# Altium PCB IOTM222.PcbDoc
Units mm, origin at the board's own origin, x right, y up, seen from the top; angles counter-clockwise.
Board outline 53.97 x 44 mm, 4 copper layers (Top Layer, GND-PLANE, signal-layer, Bottom Layer), stack 1.862 mm thick; 7 components, 78 nets, 421 pads, 0 vias.
Unrouted connection lines stored in the file: 155.
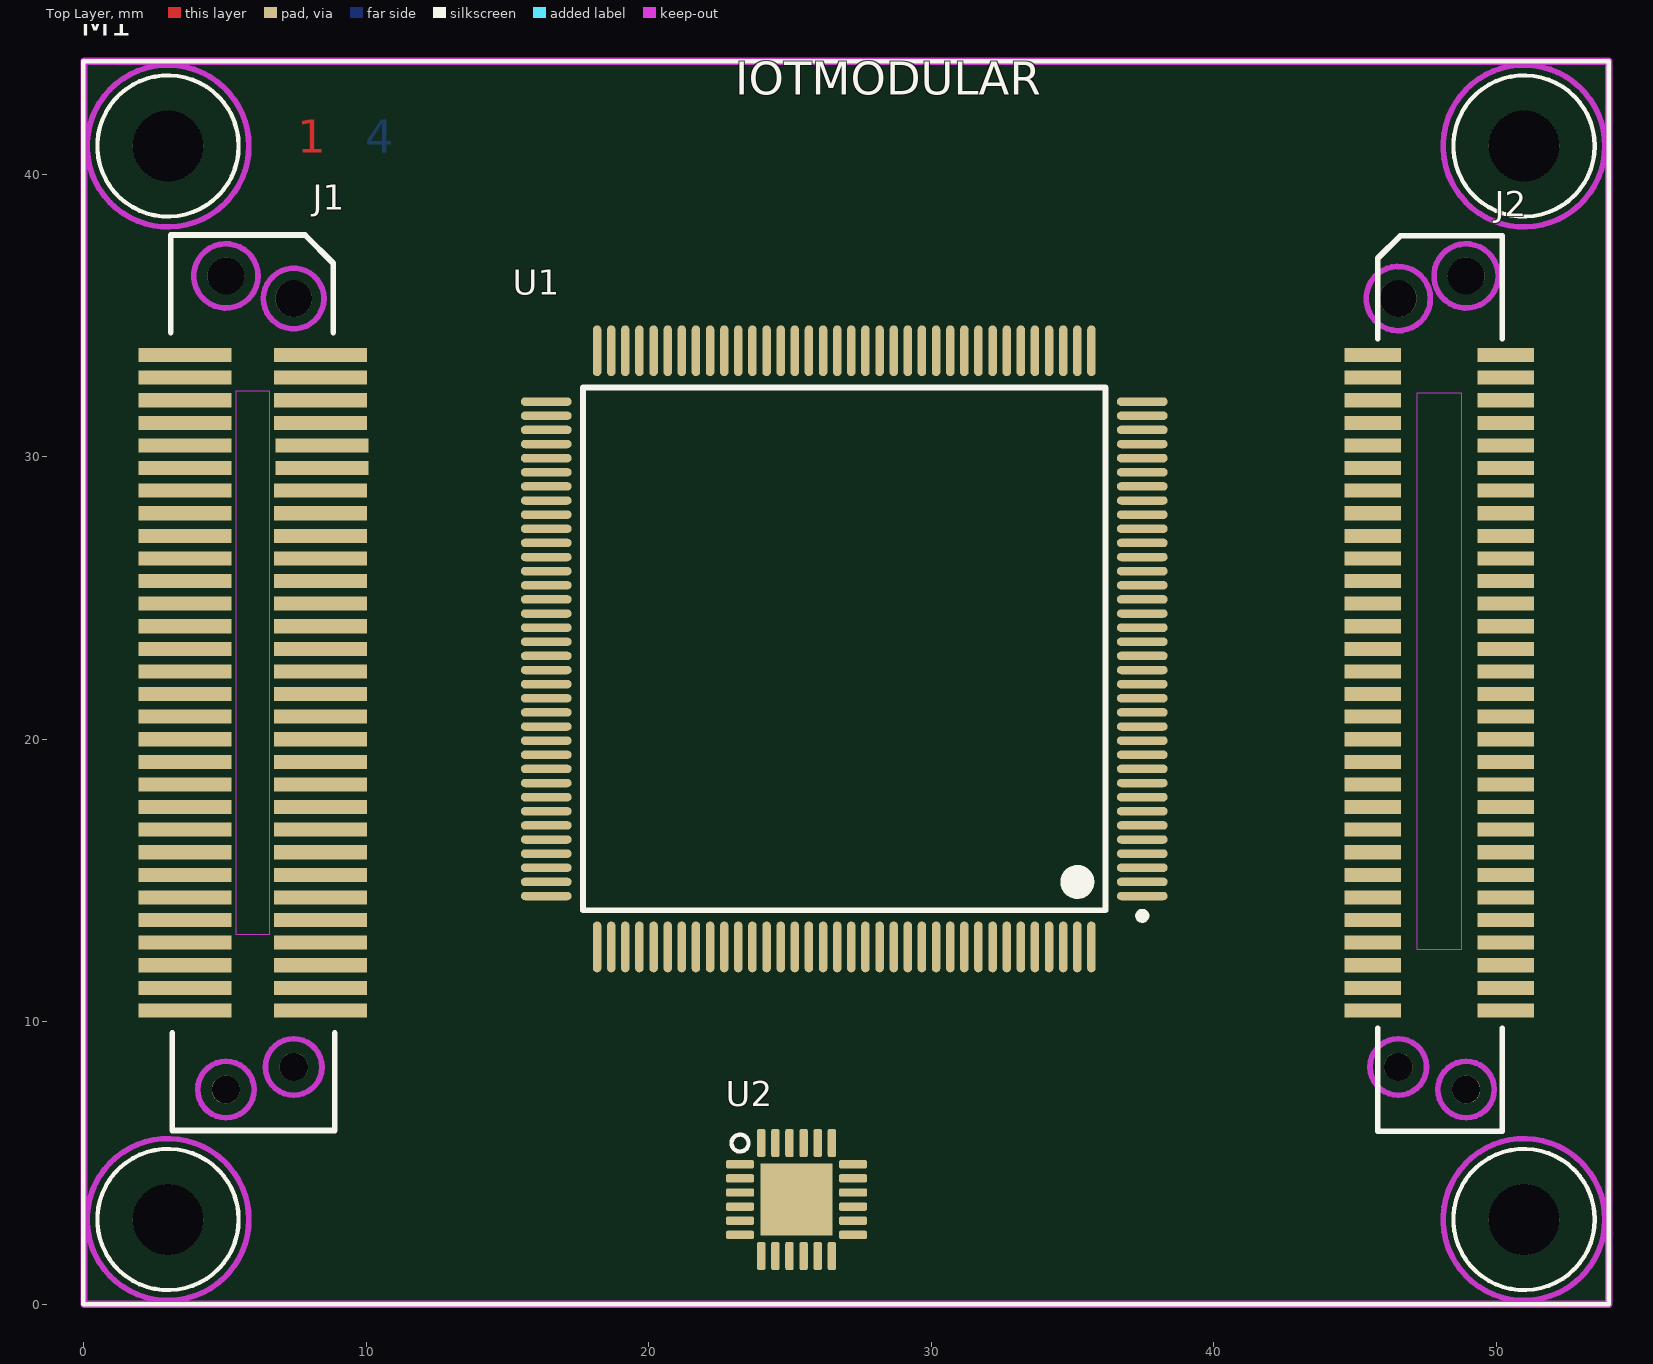
[diagram p0: Top Layer view]
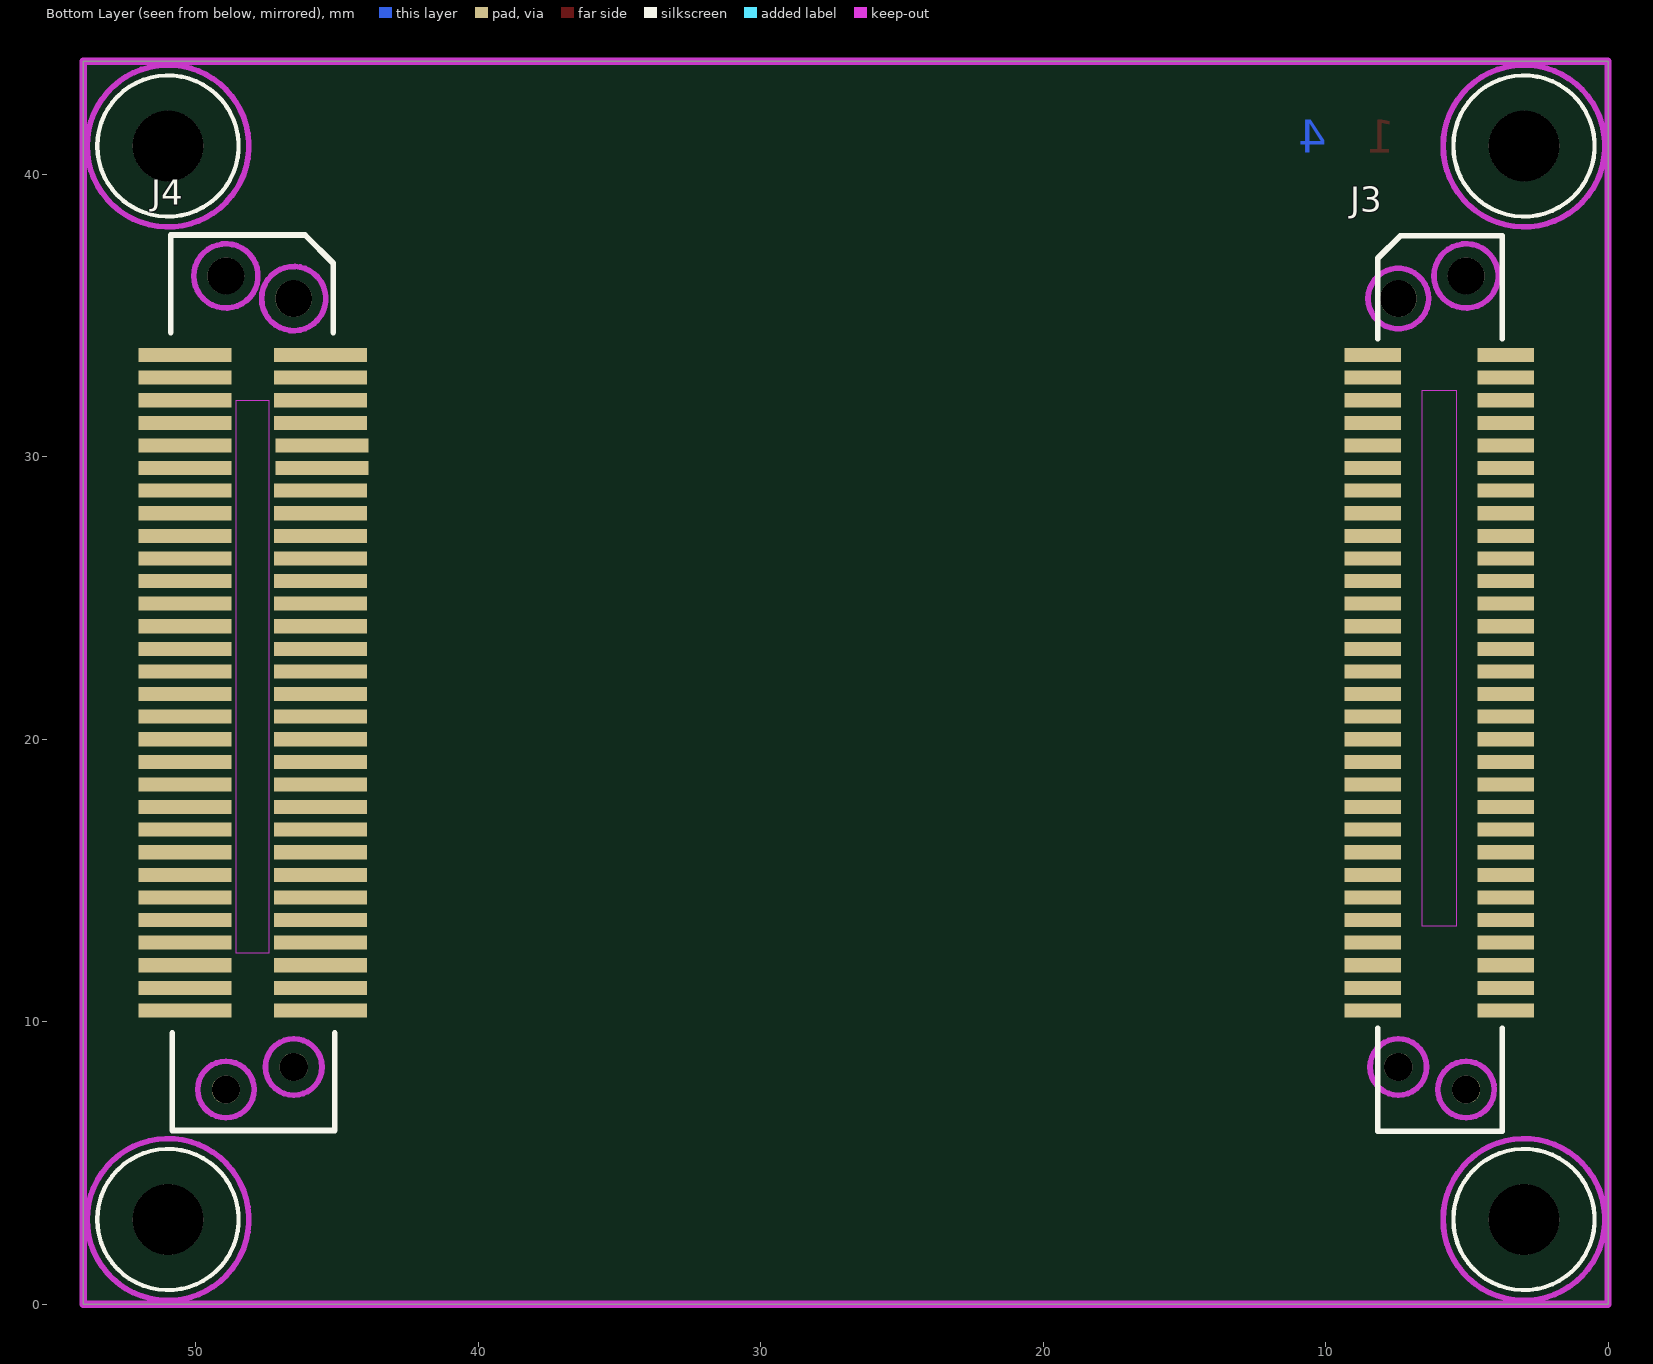
[diagram p1: Bottom Layer view, seen from below]
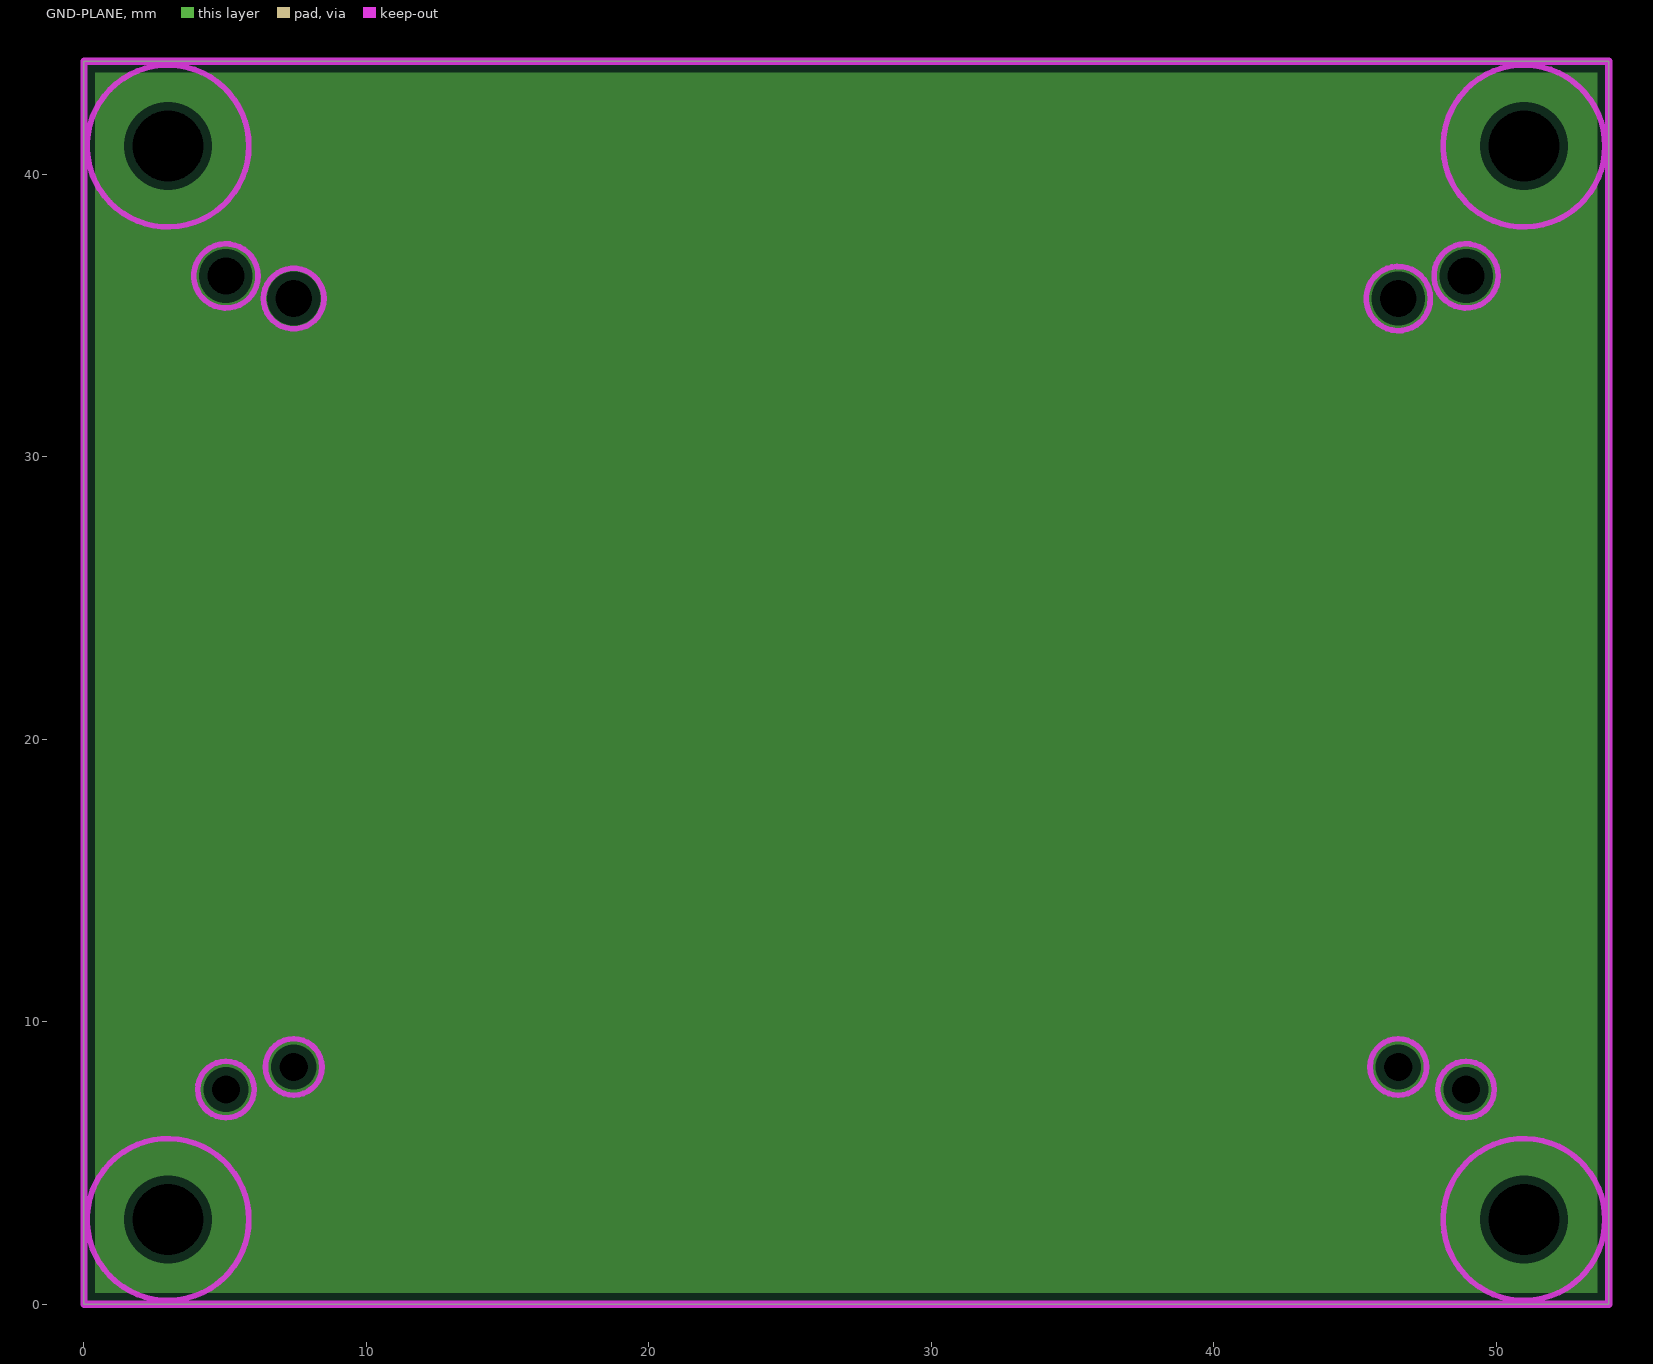
[diagram p2: GND-PLANE, clearances drawn from the general rule]
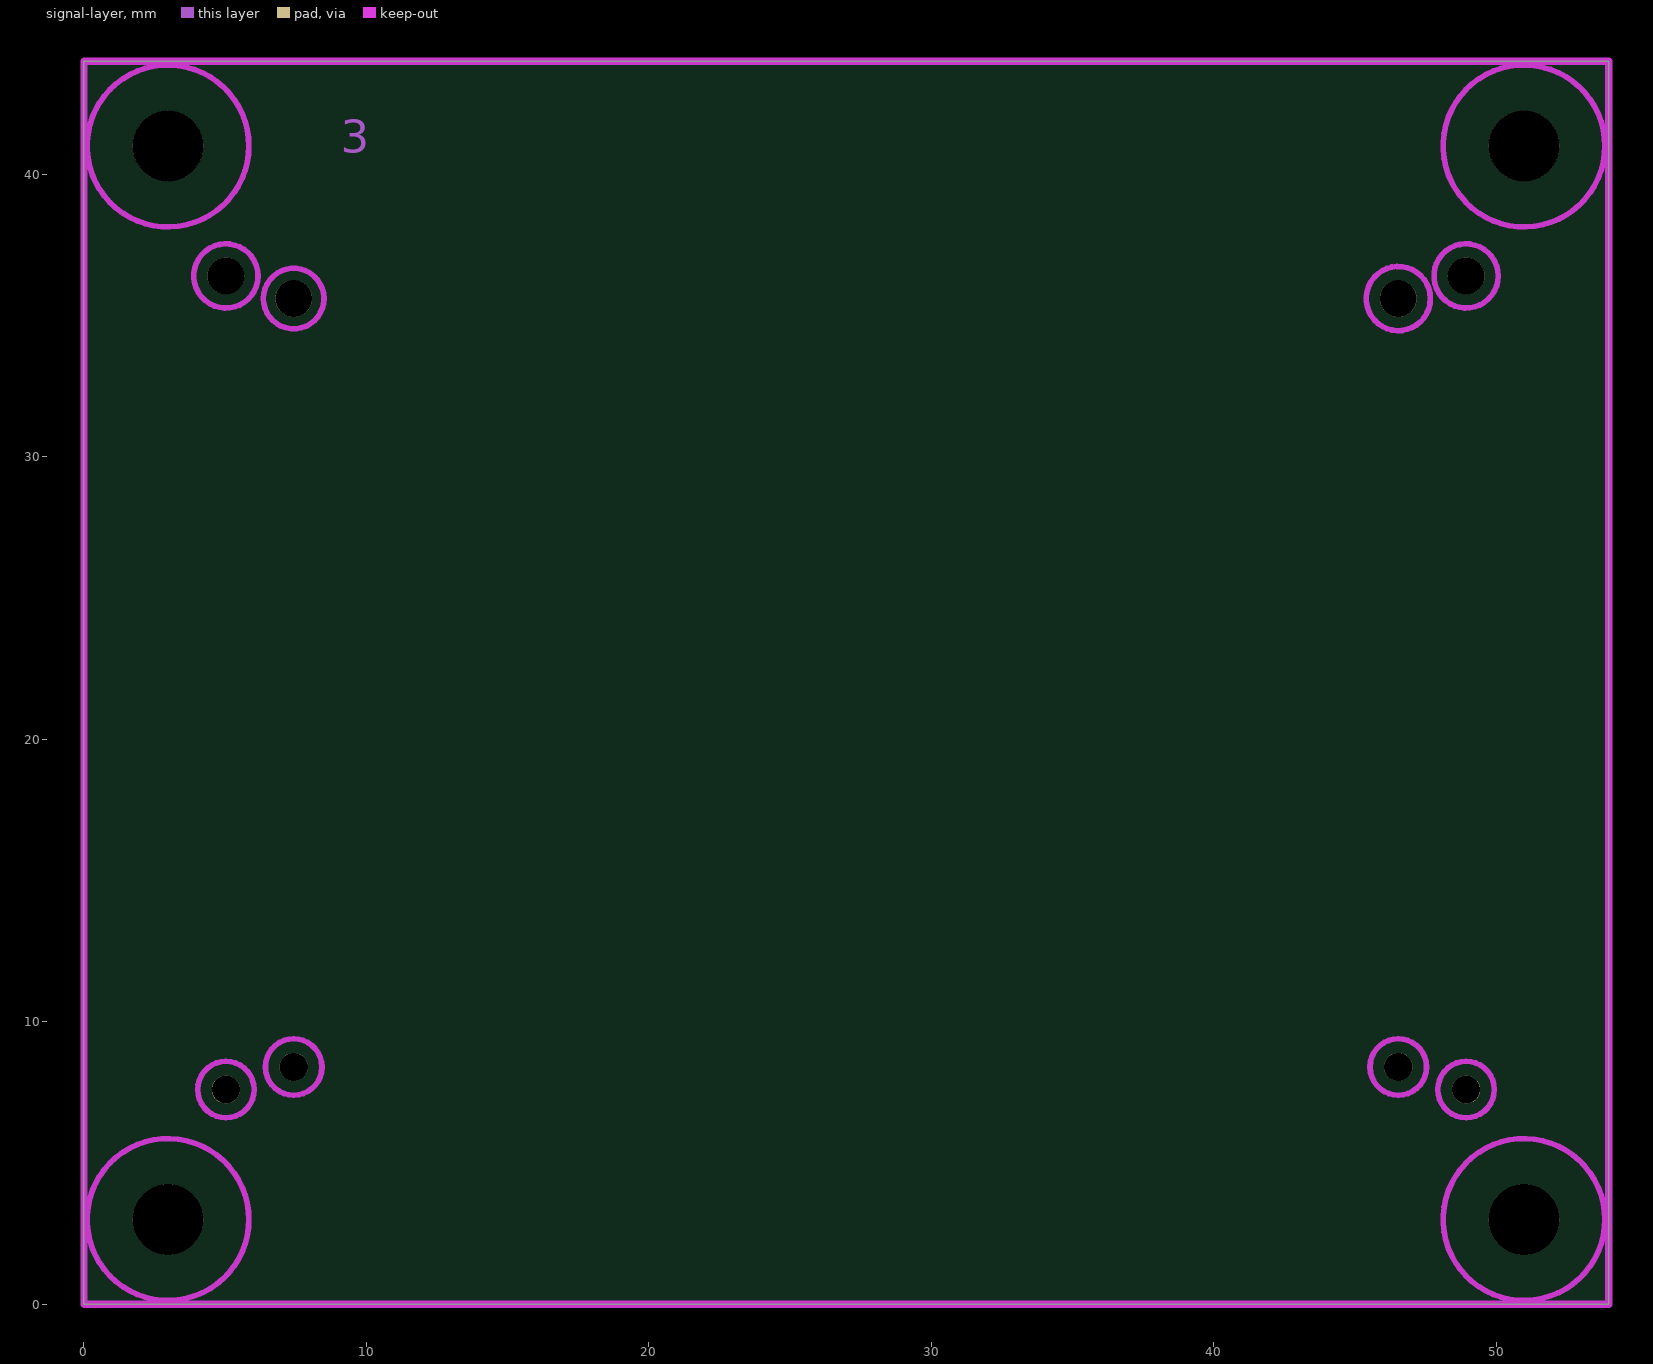
[diagram p3: signal-layer]

## Layer stack, top to bottom
Top Solder: solder mask 0.0102, Solder Resist, Dk 3.5
Top Layer: signal copper 0.0356
Dielectric1: core 0.25, FR-4, Dk 4.8
Dielectric4: dielectric 0.32, FR-4, Dk 4.8
GND-PLANE: plane copper 0.0356, net GND
Dielectric2: prepreg 0.9, FR-4, Dk 4.8
signal-layer: signal copper 0.0356
Dielectric3: core 0.25, FR-4, Dk 4.8
Bottom Layer: signal copper 0.0356
Bottom Solder: solder mask 0.0102, Solder Resist, Dk 3.5

## Board outline
0,0 0,44 53.975,44 53.975,0

## Design rules (kind name [scope] priority, off if disabled: settings)
Clearance "Clearance IN CLASS 1mm" [(InNetClass('CL-1mm'))] p1 off: gap=1 ignorepadtopadclearanceinfootprint=FALSE except(0: Arc-Hole Track-Hole SMDPad-Hole THPad-Hole Via-Hole Fill-Hole Poly-Hole Region-Hole Text-Hole)
Clearance Clearance_GND_PLANE [InNamedPolygon('GND_POLY_TOP')] p2 off: gap=0.4 ignorepadtopadclearanceinfootprint=FALSE except(0: Arc-Hole Track-Hole SMDPad-Hole THPad-Hole Via-Hole Fill-Hole Poly-Hole Region-Hole Text-Hole)
Clearance Clearance_+5V_POLY [InNamedPolygon('poly_+5V-bottom')] p3 off: gap=0.5 ignorepadtopadclearanceinfootprint=FALSE except(0: Arc-Hole Track-Hole SMDPad-Hole THPad-Hole Via-Hole Fill-Hole Poly-Hole Region-Hole Text-Hole)
Clearance [All] p4: gap=0.15 ignorepadtopadclearanceinfootprint=FALSE except(0: Arc-Hole Track-Hole SMDPad-Hole THPad-Hole Via-Hole Fill-Hole Poly-Hole Region-Hole Text-Hole)
MinimumAnnularRing [All] p1: minimumring=0.15
PlaneClearance [All] p1: clearance=0.3
PlaneConnect Plane_ConnectStyle_1 [(Name = 'C1-1') Or (Name = 'C1-2') Or (Name = 'C2-1') Or (Name = 'C2-2') Or (Name = 'C3-1') Or (Name = 'C3-2') Or (Name = 'C4-1') Or (Name = 'C4-2') Or (Name = 'C5-1') Or (Name = 'C5-2') Or (Name = 'C6-1') Or (Name = 'C6-2') Or (Name = 'C7-1')] p1 off: planeconnectstyle=Relief reliefexpansion=1.27 reliefentries=4 reliefconductorwidth=0.381 reliefairgap=0.508
PlaneConnect [All] p2: planeconnectstyle=Direct reliefexpansion=0.635 reliefentries=4 reliefconductorwidth=0.305 reliefairgap=0.254
PolygonConnect [All] p1: connectstyle=Direct reliefconductorwidth=0.254 reliefentries=4 polygonreliefangle="90 Angle" airgapwidth=0.254
RoomDefinition IOTM222 [InComponentClass('IOTM222')] p1: confinementstyle=ConfineIn formatcopy=TRUE lockcomponents=FALSE outline -254.443,-324.96 -203.643,-324.96 -203.643,-299.56 -254.443,-299.56
RoomDefinition IOTM-222B [InComponentClass('IOTM-222B')] p2: confinementstyle=ConfineIn formatcopy=TRUE lockcomponents=FALSE outline -254.443,-324.96 -203.643,-324.96 -203.643,-299.56 -254.443,-299.56
RoutingVias VIASWITDTH2MM [(InNetClass('W-2mm'))] p1 off: holewidth=1 width=1.8 viastyle="Through Hole" minholewidth=0.4 minwidth=0.7 maxholewidth=1 maxwidth=1.8
RoutingVias VIASWITDTH1MM [(InNetClass('W-2mm'))] p2 off: holewidth=0.5 width=1 viastyle="Through Hole" minholewidth=0.5 minwidth=1 maxholewidth=0.5 maxwidth=1
RoutingVias VIASWITDTH1.5MM [(InNetClass('W-2mm'))] p3 off: holewidth=0.9 width=1.4 viastyle="Through Hole" minholewidth=0.9 minwidth=1.4 maxholewidth=0.9 maxwidth=1.4
RoutingVias [All] p4: holewidth=0.2 width=0.5 viastyle="Through Hole" minholewidth=0.2 minwidth=0.5 maxholewidth=4 maxwidth=2
SilkToSolderMaskClearance SilkscreenOverComponentPads [IsPad] p1: minsilkscreentomaskgap=0.254 clearancetoexposedcopper=TRUE
SolderMaskExpansion [All] p1: expansion=0 istentingtop=FALSE
Width 12V_PLANE [(InNet('+12V')) and (IsPolygon)] p1 off: maxlimit=0.3 minlimit=0.2 preferedwidth=0.2
Width GND_PLANE [(InNet('GND'))  and (IsPolygon)] p2 off: maxlimit=0.3 minlimit=0.2 preferedwidth=0.2
Width WIDTH2MM [(InNetClass('W-2mm'))] p3 off: maxlimit=2 minlimit=0.25 preferedwidth=2
Width WIDTH1.5MM [(InNetClass('W-1.5mm'))] p4 off: maxlimit=2 minlimit=0.5 preferedwidth=1.5
Width "WIDTH 1MM" [(InNetClass('W-1mm'))] p5 off: maxlimit=2 minlimit=0.75 preferedwidth=1
Width WIDTH0.3MM [(InNetClass('W-0.3mm'))] p6: maxlimit=2 minlimit=0.3 preferedwidth=0.3
Width WIDTH0.25MM [(InNetClass('W-0.25mm'))] p7 off: maxlimit=2 minlimit=0.2 preferedwidth=0.25
Width [All] p8: maxlimit=4 minlimit=0.15 preferedwidth=0.15
27 further rules are at their usual default settings.

## Classes and differential pairs
component class IOTM222: U1 U2
component class IOTM-222B: J1 J2 J3 J4 M1

## Components (designator, comment, footprint, x,y, rotation, side; value= is the part's Value field where it differs from the comment)
J1 "HEADER BOARD-BOARD 60 PINS  PITCH 0.4mm" IOT-HIROSE-FX6-60S-0.8SV(71)-TOP 5.975,22 r0 top locked
J2 "HEADER BOARD-BOARD 60 PINS  PITCH 0.4mm" IOT-HIROSE-FX6-60P-0.8SV(71)-TOP 47.975,22 r0 top
J3 "HEADER BOARD-BOARD 60 PINS  PITCH 0.4mm" IOT-HIROSE-FX6-60P-0.8SV(71)-TOP 5.975,22 r180 bottom
J4 "HEADER BOARD-BOARD 60 PINS  PITCH 0.4mm" IOT-HIROSE-FX6-60S-0.8SV(71)-TOP 47.975,22 r180 bottom
M1 "IOTMODULAR" IOTMODULAR 26.975,22 r0 top locked
U1 "LCMXO2-4000HC-5TG144I" TQFP144_N 26.913,23.2 r180 top
U2 "CP2112" QFN24 25.224,3.706 r0 top

## Footprints (in the part's own frame and the unit in brackets; to place one, negate y for a bottom-side part, rotate by r counter-clockwise, add the part's x,y. Pads: shape width x height; smd on the part's side, far side on the other; paste and mask are expansions set on the pad)
IOT-HIROSE-FX6-60P-0.8SV(71)-TOP [mm]
  rect 2x0.5 smd mask+0: 1(-2.35,11.6) 2(-2.35,10.8) 3(-2.35,10) 4(-2.35,9.2) 5(-2.35,8.4) 6(-2.35,7.6) 7(-2.35,6.8) 8(-2.35,6) 9(-2.35,5.2) 10(-2.35,4.4) 11(-2.35,3.6) 12(-2.35,2.8) 13(-2.35,2) 14(-2.35,1.2) 15(-2.35,0.4) 16(-2.35,-0.4) 17(-2.35,-1.2) 18(-2.35,-2) 19(-2.35,-2.8) 20(-2.35,-3.6) 21(-2.35,-4.4) 22(-2.35,-5.2) 23(-2.35,-6) 24(-2.35,-6.8) 25(-2.35,-7.6) 26(-2.35,-8.4) 27(-2.35,-9.2) 28(-2.35,-10) 29(-2.35,-10.8) 30(-2.35,-11.6) 31(2.35,-11.6) 32(2.35,-10.8) 33(2.35,-10) 34(2.35,-9.2) 35(2.35,-8.4) 36(2.35,-7.6) 37(2.35,-6.8) 38(2.35,-6) 39(2.35,-5.2) 40(2.35,-4.4) 41(2.35,-3.6) 42(2.35,-2.8) 43(2.35,-2) 44(2.35,-1.2) 45(2.35,-0.4) 46(2.35,0.4) 47(2.35,1.2) 48(2.35,2) 49(2.35,2.8) 50(2.35,3.6) 51(2.35,4.4) 52(2.35,5.2) 53(2.35,6) 54(2.35,6.8) 55(2.35,7.6) 56(2.35,8.4) 57(2.35,9.2) 58(2.35,10) 59(2.35,10.8) 60(2.35,11.6)
  round 1 hole 1 unplated mask+0: 37(0.95,-14.4)
  round 1.3 hole 1.3 unplated mask+0: 37(0.95,14.4)
  silkscreen extent -2.17,-15.87 2.23,15.83, body extent -2.85,-15.9 2.85,15.9, height 5
IOT-HIROSE-FX6-60S-0.8SV(71)-TOP [mm]
  rect 3.3x0.5 smd mask+0: 1(2.4,11.6) 2(2.4,10.8) 3(2.4,10) 4(2.4,9.2) 5(2.45,8.4) 6(2.45,7.6) 7(2.4,6.8) 8(2.4,6) 9(2.4,5.2) 10(2.4,4.4) 11(2.4,3.6) 12(2.4,2.8) 13(2.4,2) 14(2.4,1.2) 15(2.4,0.4) 16(2.4,-0.4) 17(2.4,-1.2) 18(2.4,-2) 19(2.4,-2.8) 20(2.4,-3.6) 21(2.4,-4.4) 22(2.4,-5.2) 23(2.4,-6) 24(2.4,-6.8) 25(2.4,-7.6) 26(2.4,-8.4) 27(2.4,-9.2) 28(2.4,-10) 29(2.4,-10.8) 30(2.4,-11.6) 31(-2.4,-11.6) 32(-2.4,-10.8) 33(-2.4,-10) 34(-2.4,-9.2) 35(-2.4,-8.4) 36(-2.4,-7.6) 37(-2.4,-6.8) 38(-2.4,-6) 39(-2.4,-5.2) 40(-2.4,-4.4) 41(-2.4,-3.6) 42(-2.4,-2.8) 43(-2.4,-2) 44(-2.4,-1.2) 45(-2.4,-0.4) 46(-2.4,0.4) 47(-2.4,1.2) 48(-2.4,2) 49(-2.4,2.8) 50(-2.4,3.6) 51(-2.4,4.4) 52(-2.4,5.2) 53(-2.4,6) 54(-2.4,6.8) 55(-2.4,7.6) 56(-2.4,8.4) 57(-2.4,9.2) 58(-2.4,10) 59(-2.4,10.8) 60(-2.4,11.6)
  round 1 hole 1 unplated mask+0: 37(1.45,-13.6)
  round 1.3 hole 1.3 unplated mask+0: 37(1.45,13.6)
  silkscreen extent -2.9,-15.85 2.9,15.85, body extent -3.55,-15.9 3.55,15.9, height 4.1
IOTMODULAR [mm]
  round 2.5 hole 2.5 unplated paste+0: 1(-24,-19) 2(-24,19) 3(24,19) 4(24,-19)
  silkscreen extent -27,-22 27,22
QFN24 [mm]
  rrect50% 1x0.3 smd paste+0: 1(-2,1.25) 2(-2,0.75) 3(-2,0.25) 4(-2,-0.25) 5(-2,-0.75) 6(-2,-1.25) 13(2,-1.25) 14(2,-0.75) 15(2,-0.25) 16(2,0.25) 17(2,0.75) 18(2,1.25)
  rrect50% 0.3x1 smd paste+0: 7(-1.25,-2) 8(-0.75,-2) 9(-0.25,-2) 10(0.25,-2) 11(0.75,-2) 12(1.25,-2) 19(1.25,2) 20(0.75,2) 21(0.25,2) 22(-0.25,2) 23(-0.75,2) 24(-1.25,2)
  rect 2.55x2.55 smd: 25(0,0)
  silkscreen extent -2.3,1.7 -1.7,2.3, body extent -2,-2 2,2, height 1
TQFP144_N [mm] "Thin QFP, 144-Leads, Body 20x20mm, Pitch 0.5mm, IPC Medium Density"
  oval 1.8x0.3 smd: 1(-10.55,8.75) 2(-10.55,8.25) 3(-10.55,7.75) 4(-10.55,7.25) 5(-10.55,6.75) 6(-10.55,6.25) 7(-10.55,5.75) 8(-10.55,5.25) 9(-10.55,4.75) 10(-10.55,4.25) 11(-10.55,3.75) 12(-10.55,3.25) 13(-10.55,2.75) 14(-10.55,2.25) 15(-10.55,1.75) 16(-10.55,1.25) 17(-10.55,0.75) 18(-10.55,0.25) 19(-10.55,-0.25) 20(-10.55,-0.75) 21(-10.55,-1.25) 22(-10.55,-1.75) 23(-10.55,-2.25) 24(-10.55,-2.75) 25(-10.55,-3.25) 26(-10.55,-3.75) 27(-10.55,-4.25) 28(-10.55,-4.75) 29(-10.55,-5.25) 30(-10.55,-5.75) 31(-10.55,-6.25) 32(-10.55,-6.75) 33(-10.55,-7.25) 34(-10.55,-7.75) 35(-10.55,-8.25) 36(-10.55,-8.75) 73(10.55,-8.75) 74(10.55,-8.25) 75(10.55,-7.75) 76(10.55,-7.25) 77(10.55,-6.75) 78(10.55,-6.25) 79(10.55,-5.75) 80(10.55,-5.25) 81(10.55,-4.75) 82(10.55,-4.25) 83(10.55,-3.75) 84(10.55,-3.25) 85(10.55,-2.75) 86(10.55,-2.25) 87(10.55,-1.75) 88(10.55,-1.25) 89(10.55,-0.75) 90(10.55,-0.25) 91(10.55,0.25) 92(10.55,0.75) 93(10.55,1.25) 94(10.55,1.75) 95(10.55,2.25) 96(10.55,2.75) 97(10.55,3.25) 98(10.55,3.75) 99(10.55,4.25) 100(10.55,4.75) 101(10.55,5.25) 102(10.55,5.75) 103(10.55,6.25) 104(10.55,6.75) 105(10.55,7.25) 106(10.55,7.75) 107(10.55,8.25) 108(10.55,8.75)
  oval 0.3x1.8 smd: 37(-8.75,-10.55) 38(-8.25,-10.55) 39(-7.75,-10.55) 40(-7.25,-10.55) 41(-6.75,-10.55) 42(-6.25,-10.55) 43(-5.75,-10.55) 44(-5.25,-10.55) 45(-4.75,-10.55) 46(-4.25,-10.55) 47(-3.75,-10.55) 48(-3.25,-10.55) 49(-2.75,-10.55) 50(-2.25,-10.55) 51(-1.75,-10.55) 52(-1.25,-10.55) 53(-0.75,-10.55) 54(-0.25,-10.55) 55(0.25,-10.55) 56(0.75,-10.55) 57(1.25,-10.55) 58(1.75,-10.55) 59(2.25,-10.55) 60(2.75,-10.55) 61(3.25,-10.55) 62(3.75,-10.55) 63(4.25,-10.55) 64(4.75,-10.55) 65(5.25,-10.55) 66(5.75,-10.55) 67(6.25,-10.55) 68(6.75,-10.55) 69(7.25,-10.55) 70(7.75,-10.55) 71(8.25,-10.55) 72(8.75,-10.55) 109(8.75,10.55) 110(8.25,10.55) 111(7.75,10.55) 112(7.25,10.55) 113(6.75,10.55) 114(6.25,10.55) 115(5.75,10.55) 116(5.25,10.55) 117(4.75,10.55) 118(4.25,10.55) 119(3.75,10.55) 120(3.25,10.55) 121(2.75,10.55) 122(2.25,10.55) 123(1.75,10.55) 124(1.25,10.55) 125(0.75,10.55) 126(0.25,10.55) 127(-0.25,10.55) 128(-0.75,10.55) 129(-1.25,10.55) 130(-1.75,10.55) 131(-2.25,10.55) 132(-2.75,10.55) 133(-3.25,10.55) 134(-3.75,10.55) 135(-4.25,10.55) 136(-4.75,10.55) 137(-5.25,10.55) 138(-5.75,10.55) 139(-6.25,10.55) 140(-6.75,10.55) 141(-7.25,10.55) 142(-7.75,10.55) 143(-8.25,10.55) 144(-8.75,10.55)
  silkscreen extent -10.68,-9.25 9.25,9.57, body extent -10,-10 10,10, height 1.6

## Part data
J1 J3: library part "HEADER 60-NBUS-A", ComponentLink1Description=http://www.molex.com/pdm_docs/sd/5037726010_sd.pdf?src-supplier=Digi-Key, ComponentLink1URL=http://www.molex.com/pdm_docs/sd/5037726010_sd.pdf?src-supplier=Digi-Key, S.Description="CONN RCPT 60POS 0.4MM SMD GOLD"
J2 J4: library part "HEADER 60-NBUS-B"
U1: "MachXO2 High Performance CPLD with 4320 LUTs, Voltage Regulator, 2.5V/3.3V, 144-pin TQFP, Speed Grade-5, Industrial Grade, Halogen Free (RoHS)", Code_JEDEC=MS-026-BFB, ComponentLink1Description="Manufacturer URL", ComponentLink1URL=http://www.latticesemi.com/, ComponentLink2Description=Datasheet, ComponentLink2URL=http://www.latticesemi.com/documents/DS1035.pdf, ComponentLink3Description="Package Specification", ComponentLink3URL=http://www.latticesemi.com/lit/docs/package/pkg.pdf, DatasheetVersion="ver01.5, Aug-2011", PackageDescription="144-Pin Thin Quad Flat Pack (TQFP144)", PackageReference=TQFP144, PackageVersion="ver02.8, Jul-2011"

## Nets (pads, with @x,y where several pads share a name; then routed paths per layer and width w, separated by ;. In a path a pad name is that pad's centre, name@x,y a point inside that pad or via, vN(x,y) a via of type N, cw(c..) or ccw(c..) an arc to the next point about the centre after c; other vN are vias at no path point)
3.3V: J1.30 J2.30 J2.31 J3.30 J4.30 J4.31
+5V: J1.28 J1.32 J2.28 J2.33 J3.28 J3.32 J4.28 J4.33
GND: J1.2 J1.29 J1.31 J1.58 J2.2 J2.29 J2.32 J2.59 J3.2 J3.29 J3.31 J3.58 J4.2 J4.29 J4.32 J4.59
JTAG-TCK-SWDCLK: J2.47 J4.47
JTAG-TMS-SWDIO: J2.49 J4.49
P0.0: J2.41 J4.41 U1.63
P0.1: J2.42 J4.42 U1.62
P0.2: J1.53 J3.53
P0.3: J1.54 J3.54
P0.4: J1.56 J3.56
P0.5: J1.55 J3.55
P0.6: J1.45 J3.45
P0.7: J1.44 J3.44
P0.8: J1.42 J3.42
P0.9: J1.43 J3.43
P0.10: J1.6 J3.6 U1.139
P0.11: J1.7 J3.7 U1.138
P0.15: J1.10 J3.10 U1.133
P0.16: J1.11 J3.11 U1.132
P0.17: J1.8 J3.8 U1.137
P0.18: J1.9 J3.9 U1.136
P0.19: J1.40 J3.40
P0.20: J1.41 J3.41
P0.21: J1.22 J3.22 U1.117
P0.22: J1.21 J3.21 U1.119
P0.23: J1.15 J3.15 U1.127
P0.24: J1.16 J3.16 U1.126
P0.25: J1.49 J3.49
P0.26: J1.50 J3.50
P0.27: J2.6 J4.6 U1.40
P0.28: J2.7 J4.7 U1.41
P0.29: J1.19 J3.19 U1.121
P0.30: J1.20 J3.20 U1.120
P1.0: J2.15 J4.15 U1.50
P1.1: J2.16 J4.16 U1.52
P1.4: J2.17 J4.17 U1.54
P1.8: J2.18 J4.18 U1.55
P1.9: J2.19 J4.19 U1.56
P1.10: J2.20 J4.20 U1.57
P1.14: J2.21 J4.21 U1.58
P1.15: J2.22 J4.22 U1.59
P1.16: J2.13 J4.13 U1.48
P1.17: J2.23 J4.23 U1.60
P1.18: J2.56 J4.56 U1.114
P1.19: J2.55 J4.55 U1.113
P1.20: J2.54 J4.54 U1.112
P1.21: J2.53 J4.53 U1.111
P1.22: J1.51 J3.51
P1.23: J1.14 J3.14 U1.128
P1.24: J2.9 J4.9 U1.43
P1.25: J2.51 J4.51 U1.109
P1.26: J2.8 J4.8 U1.42
P1.27: J1.48 J3.48
P1.28: J2.45 J4.45
P1.29: J2.40 J4.40 U1.65
P1.30: J2.43 J4.43
P1.31: J2.44 J4.44
P2.0: J1.4 J3.4 U1.141
P2.1: J1.5 J3.5 U1.140
P2.2: J2.4 J4.4 U1.38
P2.3: J2.5 J4.5 U1.39
P2.4: J2.46 J4.46
P2.5: J1.52 J3.52
P2.6: J2.52 J4.52 U1.110
P2.7: J1.46 J3.46
P2.8: J2.50 J4.50
P2.9: J1.13 J3.13 U1.130
P2.10: J2.57 J4.57 U1.115
P2.11: J2.39 J4.39 U1.67
P2.12: J1.18 J3.18 U1.122
P2.13: J1.17 J3.17 U1.125
P3.25: J2.14 J4.14 U1.49
P3.26: J2.11 J4.11 U1.45
P4.28: J1.39 J3.39
P4.29: J1.38 J3.38
RESET-CPU: J1.12 J2.12 J3.12 J4.12 U1.47 U1.131
RESET-OUT: J2.24 J4.24 U1.61
VBAT: J1.47 J2.10 J3.47 J4.10
pads on no net: J1.1 J1.3 J1.23 J1.24 J1.25 J1.26 J1.27 J1.33 J1.34 J1.35 J1.36 J1.37 J1.57 J1.59 J1.60 J2.1 J2.3 J2.25 J2.26 J2.27 J2.34 J2.35 J2.36 J2.37 J2.38 J2.48 J2.58 J2.60 J3.1 J3.3 J3.23 J3.24 J3.25 J3.26 J3.27 J3.33 J3.34 J3.35 J3.36 J3.37 J3.57 J3.59 J3.60 J4.1 J4.3 J4.25 J4.26 J4.27 J4.34 J4.35 J4.36 J4.37 J4.38 J4.48 J4.58 J4.60 M1.1 M1.2 M1.3 M1.4 U1.1 U1.2 U1.3 U1.4 U1.5 U1.6 U1.7 U1.8 U1.9 U1.10 U1.11 U1.12 U1.13 U1.14 U1.15 U1.16 U1.17 U1.18 U1.19 U1.20 U1.21 U1.22 U1.23 U1.24 U1.25 U1.26 U1.27 U1.28 U1.29 U1.30 U1.31 U1.32 U1.33 U1.34 U1.35 U1.36 U1.37 U1.44 U1.46 U1.51 U1.53 U1.64 U1.66 U1.68 U1.69 U1.70 U1.71 U1.72 U1.73 U1.74 U1.75 U1.76 U1.77 U1.78 U1.79 U1.80 U1.81 U1.82 U1.83 U1.84 U1.85 U1.86 U1.87 U1.88 U1.89 U1.90 U1.91 U1.92 U1.93 U1.94 U1.95 U1.96 U1.97 U1.98 U1.99 U1.100 U1.101 U1.102 U1.103 U1.104 U1.105 U1.106 U1.107 U1.108 U1.116 U1.118 U1.123 U1.124 U1.129 U1.134 U1.135 U1.142 U1.143 U1.144 U2.1 U2.2 U2.3 U2.4 U2.5 U2.6 U2.7 U2.8 U2.9 U2.10 U2.11 U2.12 U2.13 U2.14 U2.15 U2.16 U2.17 U2.18 U2.19 U2.20 U2.21 U2.22 U2.23 U2.24 U2.25

## Polygon pours and split planes (outlines as drawn)
GND on GND-PLANE (split plane): 53.573,0.402 0.402,0.402 0.402,43.598 53.573,43.598

## Keep-outs
Top Layer:
  rectangle: 5.375,13.1 6.575,32.325
  rectangle: 47.175,12.563 48.775,32.255
Bottom Layer:
  rectangle: 5.375,13.375 6.575,32.35
  rectangle: 47.4,12.425 48.55,32
Keep-Out Layer:
  circle w0.2: c50.975,41 r2.864
  circle w0.2: c2.975,41 r2.864
  circle w0.2: c2.975,3 r2.864
  circle w0.2: c50.975,3 r2.864
  circle w0.2: c48.925,36.4 r1.137
  circle w0.2: c46.525,35.6 r1.137
  circle w0.2: c7.425,35.6 r1.072
  circle w0.2: c5.025,36.4 r1.137
  lines w0.2: 6.025,7.6 cw(c5.025,7.6) 6.025,7.602 ; 8.425,8.4 cw(c7.425,8.4) 8.425,8.402 ; 47.525,8.4 cw(c46.525,8.4) 47.525,8.402 ; 49.925,7.6 cw(c48.925,7.6) 49.925,7.602
  lines w0.25: 0,0 53.975,0 53.975,44 0,44 0,0

## Other copper
Top Layer:
  text "1" at 7.555,40.365 h2
signal-layer:
  text "3" at 9.083,40.369 h2
Bottom Layer:
  text "4" at 9.958,40.371 h2
GND-PLANE (plane layer: these items are gaps in the copper):
  text "2" at 7.425,39.926 h2

## Silkscreen, mask and mechanical layers (free items; w line width, h text height)
Top Solder:
  rectangle: 7.426,40.007 11.756,41.966
Bottom Solder:
  rectangle: 7.425,39.937 11.755,41.966
Mechanical 3:
  the board outline again, w0.1